# EAGLE board Day0_Aziz Mustofa_13214027 (EAGLE 7.6.0)
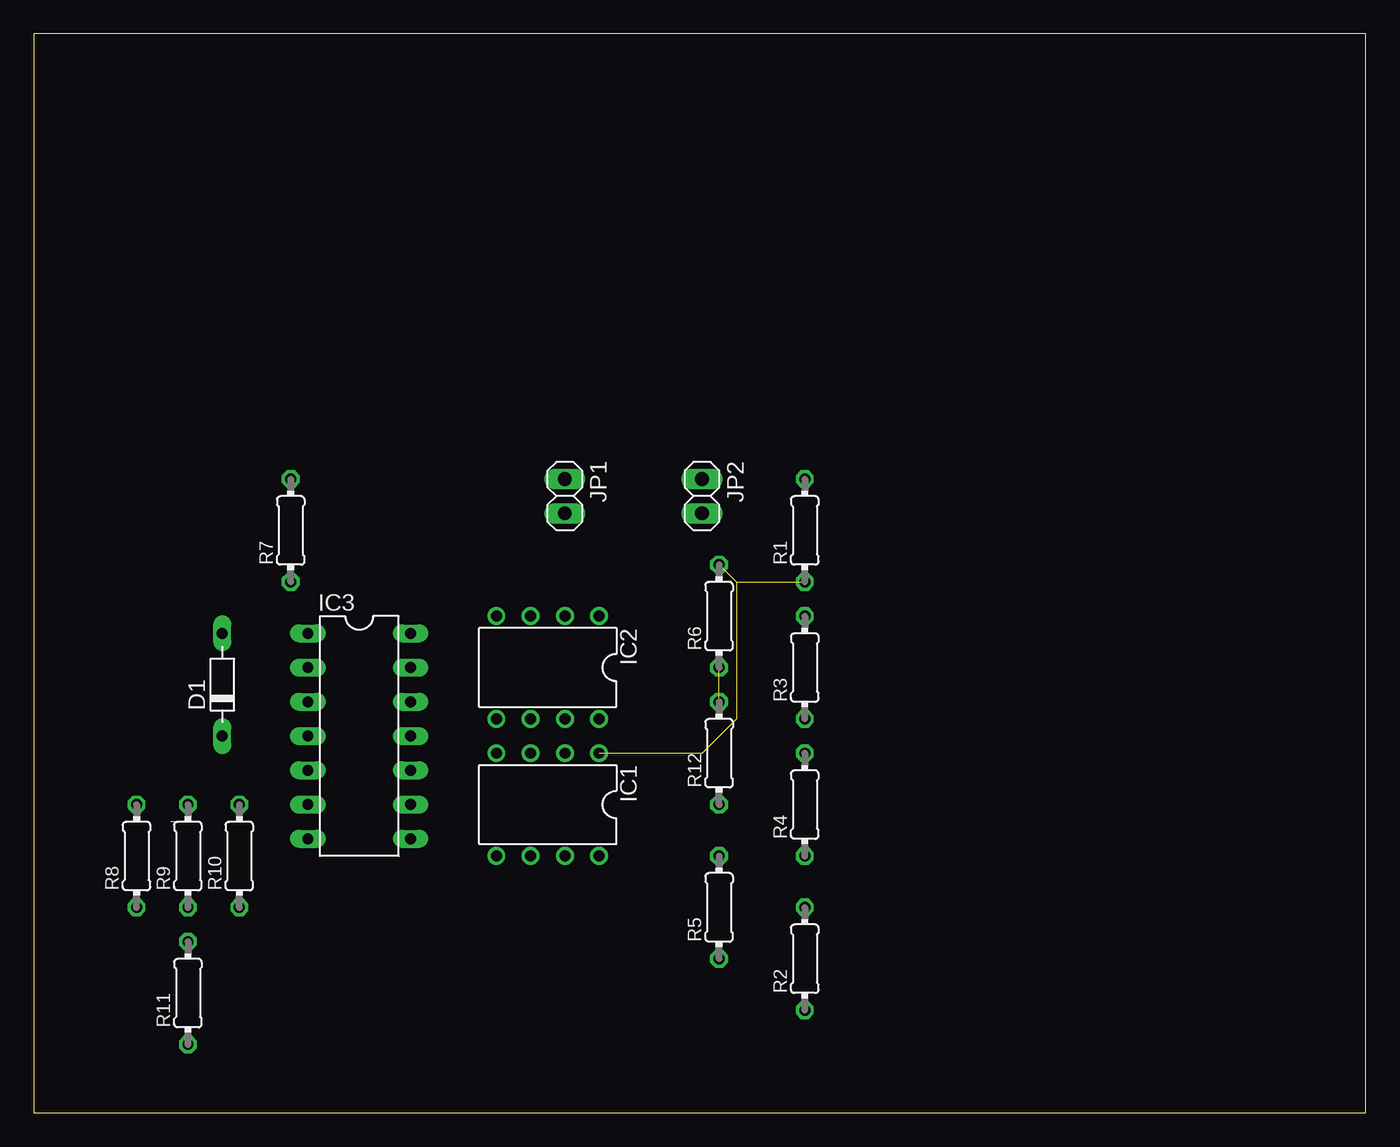
[diagram p0: board, top side]
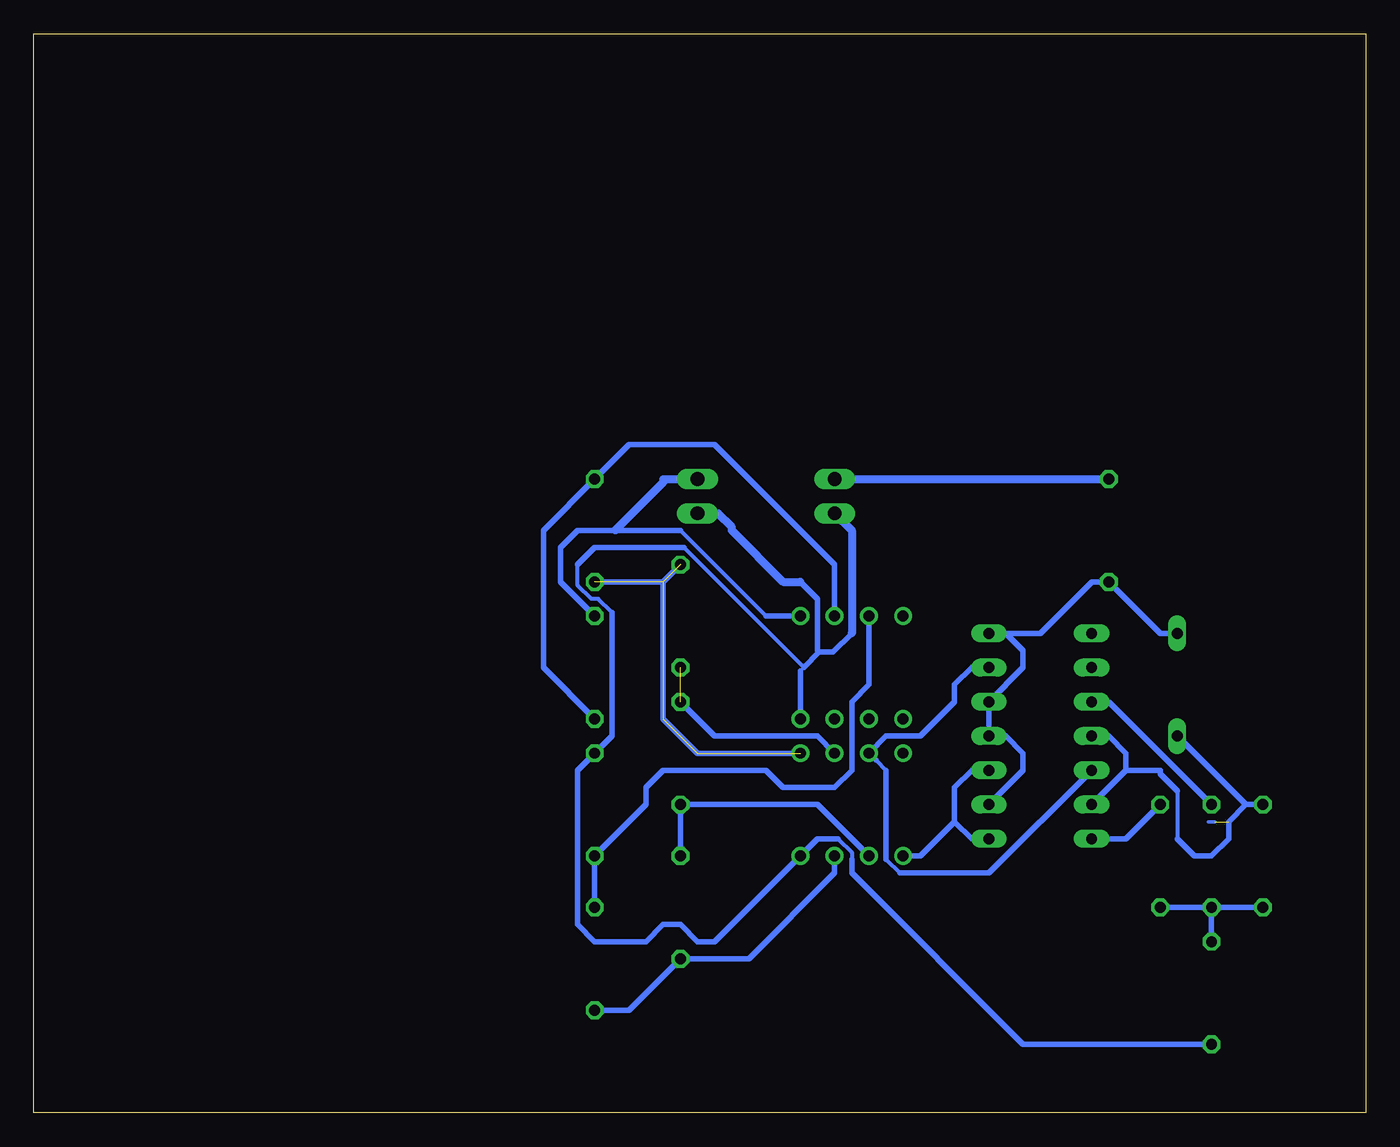
[diagram p1: board, bottom side, seen from below]

Size 98.73 x 80 mm. Coordinates in mm from the lower left corner, seen from the top.
Outline: 0,0 98.73,0 98.73,80 0,80 0,0
Copper layers (1*16): Top 10mil / dielectric 1.5mm / Bottom 10mil
Design rules "default *": minimum track width 10mil, minimum drill 24mil, track to track 10mil, track to pad 10mil, pad to pad 10mil, via to via 10mil, smd to smd 10mil, copper to edge 40mil, drill to drill 10mil, minimum pad ring 10mil, minimum via ring 10mil, stop-mask expansion 4mil, vias tented up to drill 0mil, thermal gap 10mil

## Footprints (pad centres in the part's own frame; a part is rotated, then mirrored left to right if it is on the bottom)
D-7.5 = drill 0.813 long: A 3.81,0; C -3.81,0
DIL08 = drill 0.813 pad 1.27: 1 -3.81,-3.81; 2 -1.27,-3.81; 3 1.27,-3.81; 4 3.81,-3.81; 5 3.81,3.81; 6 1.27,3.81; 7 -1.27,3.81; 8 -3.81,3.81
DIL14 = drill 0.813 long: 1 -7.62,-3.81; 2 -5.08,-3.81; 3 -2.54,-3.81; 4 0,-3.81; 5 2.54,-3.81; 6 5.08,-3.81; 7 7.62,-3.81; 8 7.62,3.81; 9 5.08,3.81; 10 2.54,3.81; 11 0,3.81; 12 -2.54,3.81; 13 -5.08,3.81; 14 -7.62,3.81
1X02 = drill 1.016 long: 1 -1.27,0; 2 1.27,0
0204/7 = drill 0.813 octagon: 1 -3.81,0; 2 3.81,0

## Placement (x,y rotation side)
D1  [D-7.5]  13.97,31.75 90 top
IC1  LM358N  [DIL08]  38.1,22.86 180 top
IC2  LM358N  [DIL08]  38.1,33.02 180 top
IC3  [DIL14]  24.13,27.94 270 top
JP1  [1X02]  39.37,45.72 270 top
JP2  [1X02]  49.53,45.72 270 top
R1  100k  [0204/7]  57.15,43.18 90 top
R2  100k  [0204/7]  57.15,11.43 90 top
R3  100k  [0204/7]  57.15,33.02 90 top
R4  100k  [0204/7]  57.15,22.86 90 top
R5  100k  [0204/7]  50.8,15.24 90 top
R6  100k  [0204/7]  50.8,36.83 90 top
R7  60k  [0204/7]  19.05,43.18 90 top
R8  12k  [0204/7]  7.62,19.05 90 top
R9  100k  [0204/7]  11.43,19.05 90 top
R10  200k  [0204/7]  15.24,19.05 90 top
R11  60k  [0204/7]  11.43,8.89 90 top
R12  1k  [0204/7]  50.8,26.67 90 top

## Library data of the parts
D1 = diode
IC1 IC2 = linear
IC3 = ic-package
JP1 JP2 = pinhead
R1-R12 = resistor

## Nets
GND: IC1.8 IC2.8 JP1.2 JP2.2 R4.2 R11.1
N$1: IC1.6 R5.2 R12.1
N$2: D1.A IC3.9 IC3.11 IC3.12 IC3.14 R7.1
N$3: D1.C IC3.4 IC3.6 R8.2
N$4: R8.1 R9.1 R10.1 R11.2
N$5: IC3.7 R10.2
N$6: IC3.3 R9.2
N$7: IC1.3 IC3.5 IC3.13
N$8: IC1.5 IC3.8 IC3.10
N$9: IC1.1 R1.1 R6.2
N$10: IC1.2 R6.1 R12.2
N$11: IC1.7 R2.1 R5.1
N$12: IC2.3 R2.2 R4.1
N$13: IC2.2 R1.2 R3.1
N$15: IC1.4
N$16: IC2.4
VCC: JP1.1 R7.2
VOUT: IC2.1 JP2.1 R3.2

## Tracks (layer width: path | path; a pad name or v marks a point on that pad's centre or on a via)
GND
  Bottom 0.254: 41.66,33.02 41.91,32.77 | 46.99,43.43 46.99,43.18 | 40.64,34.29 40.51,34.16
  Bottom 0.305: 38.1,18.8 38.1,19.3 39.12,20.32 | 50.55,41.91 41.66,33.02 | 55.88,37.08 56.9,38.1 57.4,38.1 58.42,39.12 58.42,40.64
  Bottom 0.406: 41.91,32.77 IC2.8 | 41.66,33.02 40.51,34.16 39.5,34.16 38.1,35.56 | 39.12,20.32 40.64,20.32 IC1.8 48.26,12.7 49.53,12.7 50.8,13.97 52.07,13.97 53.34,12.7 57.15,12.7 58.42,13.97 58.42,25.4 R4.2 55.88,27.94 55.88,37.08 | 50.55,41.91 57.15,41.91 58.42,40.64 | 41.91,39.37 40.64,38.1 40.64,34.29 | 38.1,18.8 38.1,17.78 25.4,5.08 R11.1
  Bottom 0.61: JP1.2 38.1,43.18 38.1,35.56 | 46.99,43.18 43.18,39.37 41.91,39.37 | 46.99,43.43 48.01,44.45 JP2.2
N$1
  Bottom 0.406: R5.2 R12.1 40.64,22.86 IC1.6
N$2
  Bottom 0.406: D1.A 15.24,35.56 R7.1 20.32,39.37 24.13,35.56 IC3.14 26.67,35.56 25.4,34.29 25.4,33.02 IC3.12 IC3.11 26.67,27.94 25.4,26.67 25.4,25.4 IC3.9
N$3  (1 unrouted)
  Bottom 0.254: 11.18,21.59 11.68,21.59
  Bottom 0.305: 13.97,23.88 13.97,20.32
  Bottom 0.406: 13.97,20.32 12.7,19.05 11.43,19.05 10.16,20.32 10.16,21.59 8.89,22.86 | R8.2 8.89,22.86 | D1.C 8.89,22.86 | 13.97,23.88 15.24,25.15 15.24,25.4 17.78,25.4 | 17.78,25.4 IC3.6 | 17.78,25.4 17.78,26.67 19.05,27.94 IC3.4
N$4
  Bottom 0.406: R8.1 R9.1 | R10.1 R9.1 | R11.2 R9.1
N$5
  Bottom 0.406: R10.2 17.78,20.32 IC3.7
N$6
  Bottom 0.406: IC3.3 19.81,30.48 19.05,30.48 R9.2
N$7
  Bottom 0.254: 28.96,33.02 IC3.13
  Bottom 0.305: 35.56,18.8 34.54,17.78 | 36.32,26.16 35.56,25.4
  Bottom 0.406: IC3.5 27.94,17.78 34.54,17.78 | 35.56,25.4 35.56,18.8 | 36.32,26.16 IC1.3 35.56,27.94 33.02,27.94 30.48,30.48 30.48,31.75 29.21,33.02 28.96,33.02
N$8
  Bottom 0.406: IC3.10 29.21,25.4 30.48,24.13 30.48,21.59 | 30.48,21.59 29.21,20.32 IC3.8 | 30.48,21.59 33.02,19.05 IC1.5
N$9  (5 unrouted)
  Bottom 0.406: IC1.1 49.53,26.67 52.07,29.21 52.07,39.37 | R1.1 52.07,39.37 | 52.07,39.37 R6.2
N$10  (1 unrouted)
  Bottom 0.406: R12.2 48.26,27.94 40.64,27.94 IC1.2
N$11
  Bottom 0.406: IC1.7 39.37,17.78 45.72,11.43 R5.1 54.61,7.62 R2.1
N$12
  Bottom 0.406: R2.2 R4.1 53.34,22.86 53.34,24.13 52.07,25.4 44.45,25.4 43.18,24.13 39.37,24.13 38.1,25.4 38.1,30.48 36.83,31.75 IC2.3
N$13
  Bottom 0.406: IC2.2 39.37,40.64 48.26,49.53 54.61,49.53 R1.2 60.96,43.18 60.96,33.02 R3.1
VCC
  Bottom 0.61: JP1.1 R7.2
VOUT
  Bottom 0.254: 55.63,43.18 55.88,43.18 | 52.07,46.74 52.07,46.99
  Bottom 0.305: 44.45,36.83 50.8,43.18
  Bottom 0.406: 44.45,36.83 IC2.1 | R3.2 59.69,39.37 59.69,41.91 58.42,43.18 55.88,43.18 | 50.8,43.18 55.63,43.18
  Bottom 0.61: 55.63,43.18 52.07,46.74 | 52.07,46.99 JP2.1